# Altium PCB Halleffektsgivare_kort.PcbDoc
Units mm, origin at the board's own origin, x right, y up, seen from the top; angles counter-clockwise.
Board outline 10 x 15.5 mm, 2 copper layers (Top Layer, Bottom Layer); 3 components, 3 nets, 10 pads, 1 vias.
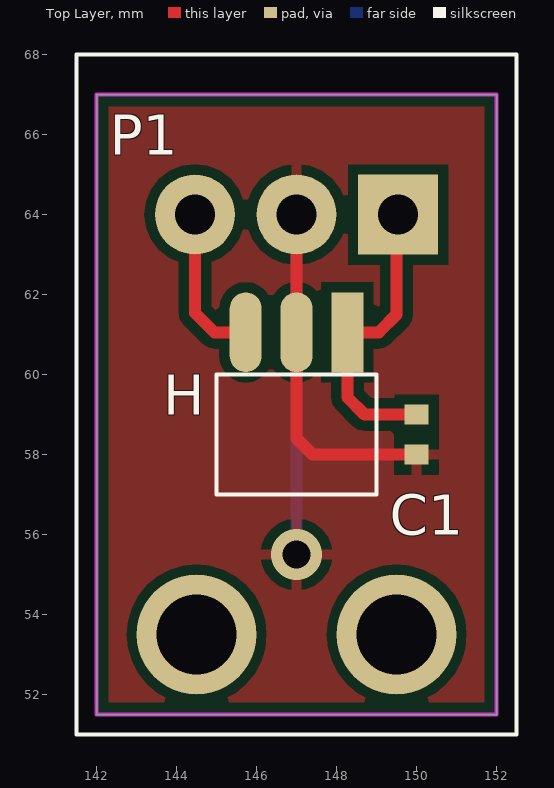
[diagram p0: Top Layer view]
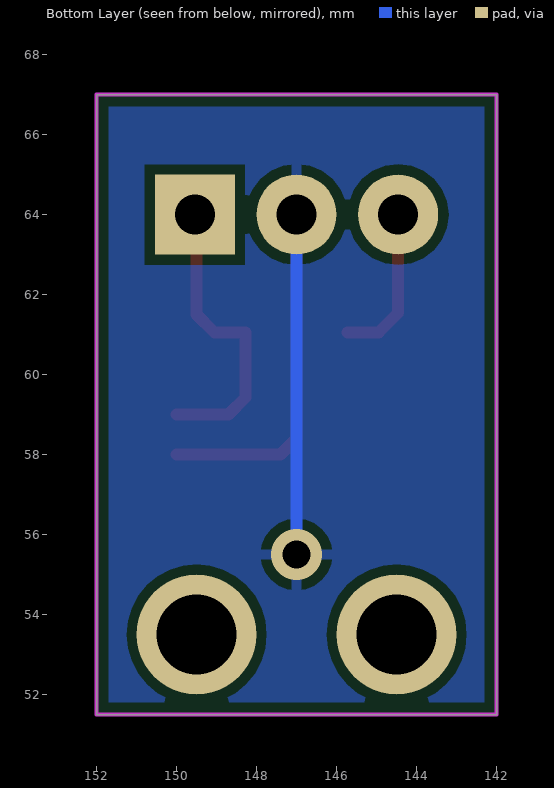
[diagram p1: Bottom Layer view, seen from below]

## Layer stack, top to bottom
Top Solder: solder mask 0.0102, Solder Resist, Dk 3.5
Top Layer: signal copper 0.0356
Dielectric 1: dielectric 0.32, FR-4, Dk 4.8
Bottom Layer: signal copper 0.0356
Bottom Solder: solder mask 0.0102, Solder Resist, Dk 3.5

## Board outline
142,51.5 152,51.5 152,67 142,67

## Design rules (kind name [scope] priority, off if disabled: settings)
Clearance [All] p1: gap=0.25 ignorepadtopadclearanceinfootprint=FALSE
PolygonConnect [All] p1: connectstyle=Relief reliefconductorwidth=0.254 reliefentries=4 polygonreliefangle="90 Angle" airgapwidth=0.254
RoutingVias [All] p1: holewidth=0.4 width=0.6 viastyle="Through Hole" minholewidth=0.4 minwidth=0.6 maxholewidth=0.4 maxwidth=0.6
SilkToSilkClearance [All] p1: silktosilkclearance=0.001
SilkToSolderMaskClearance [IsPad] p1: minsilkscreentomaskgap=0.001 clearancetoexposedcopper=TRUE
SolderMaskExpansion [All] p1: expansion=0.102 istentingtop=FALSE
Width [All] p1: maxlimit=1 minlimit=0.3 preferedwidth=0.4
28 further rules are at their usual default settings.

## Classes and differential pairs
component class Halleffektsgivare_kort: C1 H

## Components (designator, comment, footprint, x,y, rotation, side; value= is the part's Value field where it differs from the comment)
C1 "0402 capacitor" "0402 CAP" 150,58.5 r90 top value=100n
H "" "Allegro A1324" 147,59 r180 top
P1 "1x3 Pin Header" padThree_L 147,64 r180 top

## Footprints (in the part's own frame and the unit in brackets; to place one, negate y for a bottom-side part, rotate by r counter-clockwise, add the part's x,y. Pads: shape width x height; smd on the part's side, far side on the other; paste and mask are expansions set on the pad)
"0402 CAP" [mm]
  rect 0.5x0.6 smd: 1(-0.5,0) 2(0.5,0)
  body extent -0.5,-0.25 0.5,0.25, height 0.5
"Allegro A1324" [mm] "Hall Effect Sensor, Allegro A1324"
  rect 0.8x2 smd: 1(-1.27,-2.056)
  oval 0.8x2 smd: 2(0,-2.056) 3(1.27,-2.056)
  silkscreen extent -2.01,-1 1.99,2
padThree_L [mm] "Pad Diameter 2 mm, Hole  0.3 mm, Pitch 2.54 mm"
  rect 2x2 hole 1: 1(-2.54,0)
  round 2 hole 1: 2(0,0) 3(2.54,0)
  body extent -3.83,-1.38 3.79,1.54, height 8.53

## Part data
H: library part "ALLEGRO A1324", "ALLEGRO A1324, SIP-3"
P1: "2.54 mm"

## Free pads (board coordinates)
  round 3 hole 2: 4(144.5,53.5) 4(149.5,53.5)

## Via types
v1: diameter 1.27, hole 0.711, Top Layer to Bottom Layer, 1 vias

## Nets (pads, with @x,y where several pads share a name; then routed paths per layer and width w, separated by ;. In a path a pad name is that pad's centre, name@x,y a point inside that pad or via, vN(x,y) a via of type N, cw(c..) or ccw(c..) an arc to the next point about the centre after c; other vN are vias at no path point)
GND: C1.1 H.2 P1.2 | length 17.3
  Top Layer w0.3: P1.2 H.2 147,58.4 147.4,58 C1.1
  Bottom Layer w0.3: v1(147,55.5) P1.2
NetC1_2: C1.2 H.1 P1.1 | length 7.5
  Top Layer w0.3: P1.1 149.5,63.96 149.5,61.5 149.056,61.056 H.1 148.27,59.43 148.7,59 C1.2
NetH_3: H.3 P1.3 | length 3.9
  Top Layer w0.3: P1.3 144.46,61.54 144.944,61.056 H.3

## Polygon pours and split planes (outlines as drawn)
GND on Top Layer "Top Layer-GND" (solid, remove dead copper, pour order 2): 142,51.5 152,51.5 152,67 142,67
GND on Bottom Layer "Top Layer-No Net" (solid, remove dead copper, pour order 1): 142,51.5 152,51.5 152,67 142,67

## Keep-outs
Keep-Out Layer:
  the board outline again, w0.1

## Silkscreen, mask and mechanical layers (free items; w line width, h text height)
Top Overlay:
  lines w0.1: 141.5,51 141.5,68 152.5,68 152.5,51 141.5,51
Mechanical 2 (Mech10):
  rectangle: 140.5,50.5 153.5,68